# EAGLE board drums (EAGLE 8.3.1)
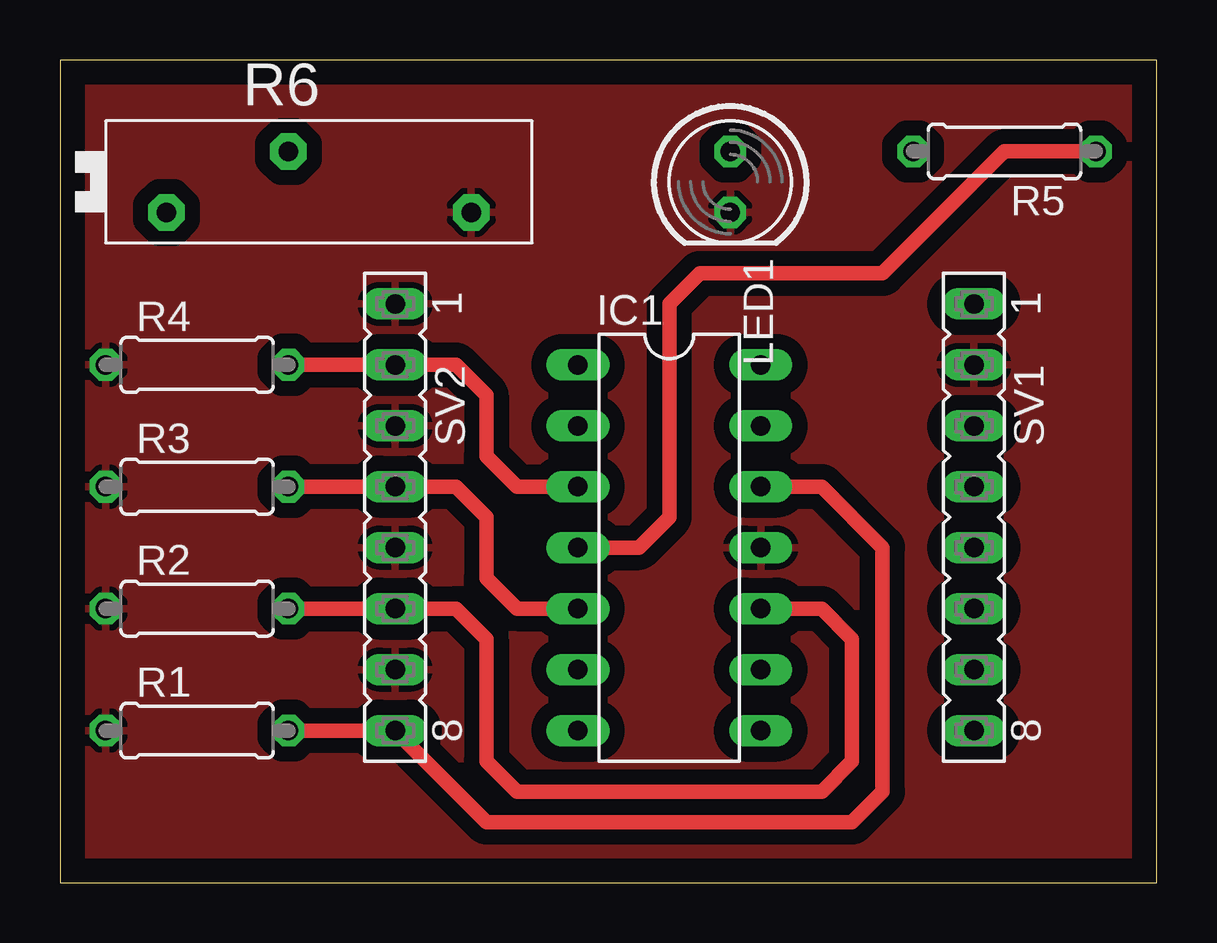
[diagram p0: board, top side]
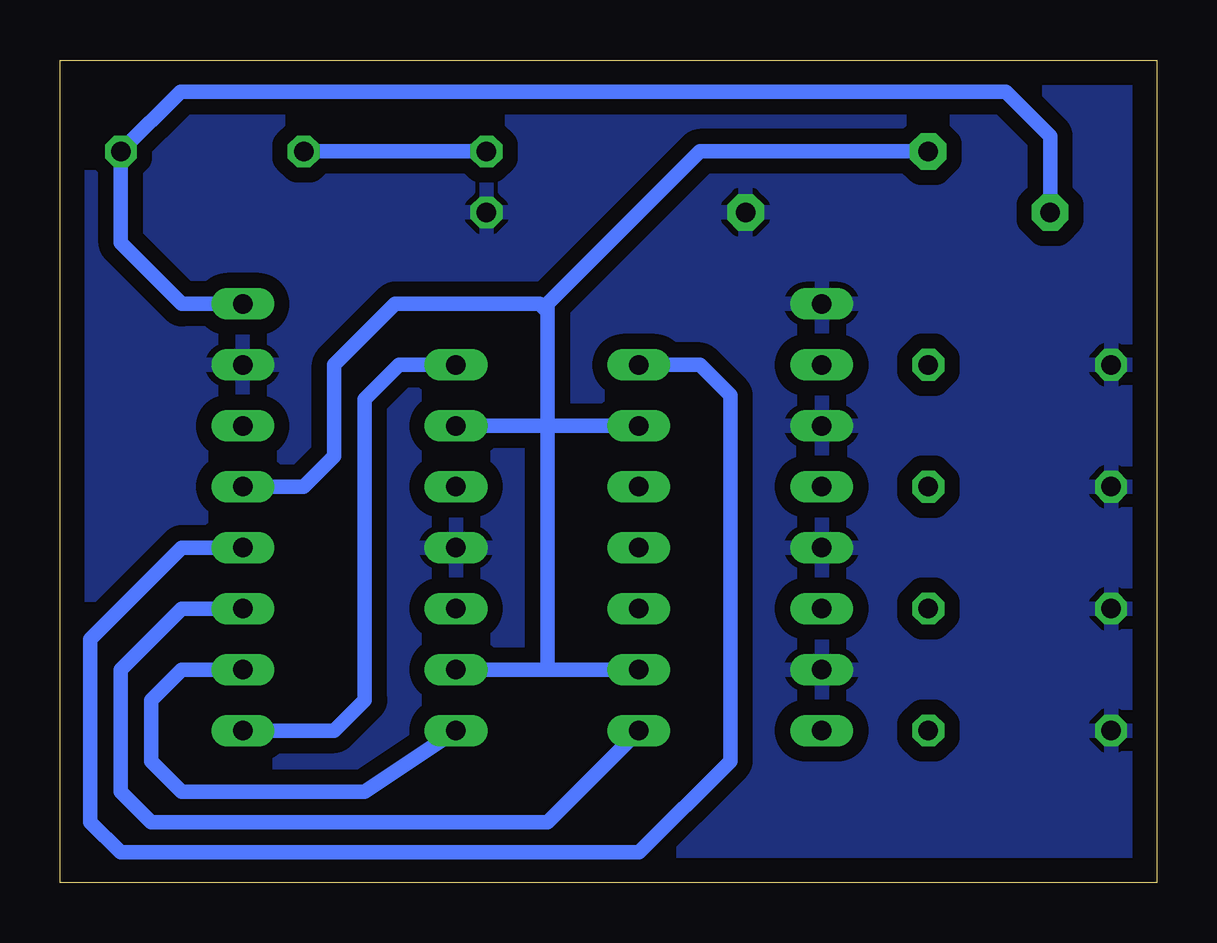
[diagram p1: board, bottom side, seen from below]

Size 45.72 x 34.29 mm. Coordinates in mm from the lower left corner, seen from the top.
Outline: 0,0 45.72,0 45.72,34.29 0,34.29 0,0
Copper layers (1*16): Top 0.035mm / dielectric 1.5mm / Bottom 0.035mm
Design rules "default": minimum track width 6mil, minimum drill 0.35mm, track to track 6mil, track to pad 6mil, pad to pad 6mil, via to via 6mil, smd to smd 6mil, copper to edge 40mil, drill to drill 6mil, minimum pad ring 10mil, minimum via ring 8mil, stop-mask expansion 4mil, vias tented up to drill 0mil, thermal gap 10mil

## Footprints (pad centres in the part's own frame; a part is rotated, then mirrored left to right if it is on the bottom)
DIL14 = drill 0.813 long: 1 -7.62,-3.81; 2 -5.08,-3.81; 3 -2.54,-3.81; 4 0,-3.81; 5 2.54,-3.81; 6 5.08,-3.81; 7 7.62,-3.81; 8 7.62,3.81; 9 5.08,3.81; 10 2.54,3.81; 11 0,3.81; 12 -2.54,3.81; 13 -5.08,3.81; 14 -7.62,3.81
LED5MM = drill 0.813 octagon: A -1.27,0; K 1.27,0
0207/7 = drill 0.813 octagon: 1 -3.81,0; 2 3.81,0
PT-SPIN = drill 0.813 pad 1.524 octagon: 1 -6.35,-1.27; 2 6.35,-1.27; 3 -1.27,1.27
FE08 = drill 0.813 long: 1 -8.89,0; 2 -6.35,0; 3 -3.81,0; 4 -1.27,0; 5 1.27,0; 6 3.81,0; 7 6.35,0; 8 8.89,0

## Placement (x,y rotation side)
IC1  ICL7641P  [DIL14]  25.4,13.97 270 top
LED1  [LED5MM]  27.94,29.21 270 top
R1  [0207/7]  5.71,6.35 0 top
R2  [0207/7]  5.71,11.43 0 top
R3  [0207/7]  5.71,16.51 0 top
R4  [0207/7]  5.71,21.59 0 top
R5  [0207/7]  39.37,30.48 180 top
R6  [PT-SPIN]  10.8,29.21 0 top
SV1  [FE08]  38.1,15.24 270 top
SV2  [FE08]  13.97,15.24 270 top

## Library data of the parts
IC1 = linear
LED1 = led
R1-R6 = rcl
SV1 SV2 = con-lsta; OC_FARNELL: unknown; OC_NEWARK: unknown

## Nets
B1: IC1.1 SV1.5
B2: IC1.7 SV1.6
B3: IC1.8 SV1.7
B4: IC1.14 SV1.8
D1: IC1.3 R4.2 SV2.2
D2: IC1.5 R3.2 SV2.4
D3: IC1.10 R2.2 SV2.6
D4: IC1.12 R1.2 SV2.8
GND: IC1.11 LED1.K R1.1 R2.1 R3.1 R4.1 R6.2 SV1.2 SV2.1 SV2.3 SV2.5 SV2.7
N$2: LED1.A R5.2
VCC: IC1.4 R5.1 R6.1 SV1.1
VREF: IC1.2 IC1.6 IC1.9 IC1.13 R6.3 SV1.4

## Tracks (layer width: path | path; a pad name or v marks a point on that pad's centre or on a via)
B1
  Bottom 0.61: SV1.5 40.64,13.97 44.45,10.16 44.45,2.54 43.18,1.27 21.59,1.27 17.78,5.08 17.78,20.32 19.05,21.59 IC1.1
B2
  Bottom 0.61: SV1.6 40.64,11.43 43.18,8.89 43.18,3.81 41.91,2.54 25.4,2.54 IC1.7
B3
  Bottom 0.61: SV1.7 40.64,8.89 41.91,7.62 41.91,5.08 40.64,3.81 33.02,3.81 IC1.8
B4
  Bottom 0.61: IC1.14 31.59,21.59 33.02,20.16 33.02,7.62 34.29,6.35 SV1.8
D1
  Top 0.61: R4.2 SV2.2 16.51,21.59 17.78,20.32 17.78,17.78 19.05,16.51 IC1.3
D2
  Top 0.61: IC1.5 19.05,11.43 17.78,12.7 17.78,15.24 16.51,16.51 SV2.4 R3.2
D3
  Top 0.61: IC1.10 31.75,11.43 33.02,10.16 33.02,5.08 31.75,3.81 19.05,3.81 17.78,5.08 17.78,10.16 16.51,11.43 SV2.6 R2.2
D4
  Top 0.61: IC1.12 31.75,16.51 34.29,13.97 34.29,3.81 33.02,2.54 17.78,2.54 SV2.8 R1.2
GND
  pour Bottom (isolate 0.635): 0,34.29 0,0 45.72,0 45.72,34.29
  pour Top (isolate 0.635): 0,34.29 0,0 45.72,0 45.72,34.29
N$2
  Bottom 0.61: LED1.A R5.2
VCC
  Top 0.61: IC1.4 24.13,13.97 25.4,15.24 25.4,24.13 26.67,25.4 34.29,25.4 39.37,30.48 R5.1
  Bottom 0.61: R6.1 4.45,31.11 6.3,32.97 40.69,32.97 R5.1 43.18,26.67 40.64,24.13 SV1.1
VREF
  Bottom 0.61: 25.45,19.05 IC1.2 | 25.45,19.05 IC1.13 | IC1.9 25.4,8.89 | 25.4,8.89 IC1.6 | 25.4,8.89 25.4,19 25.45,19.05 | R6.3 19.05,30.48 25.4,24.13 25.4,23.81 | 25.4,23.81 25.4,19.1 25.45,19.05 | SV1.4 35.56,16.51 34.29,17.78 34.29,21.59 31.75,24.13 25.72,24.13 25.4,23.81